# Altium PCB 4 by 4 Keypad.PcbDoc
Units mil, origin at the board's own origin, x right, y up, seen from the top; angles counter-clockwise.
Board outline 1984.9 x 1984.9 mil, 2 copper layers (Top Layer, Bottom Layer); 16 components, 0 nets, 68 pads, 16 vias.
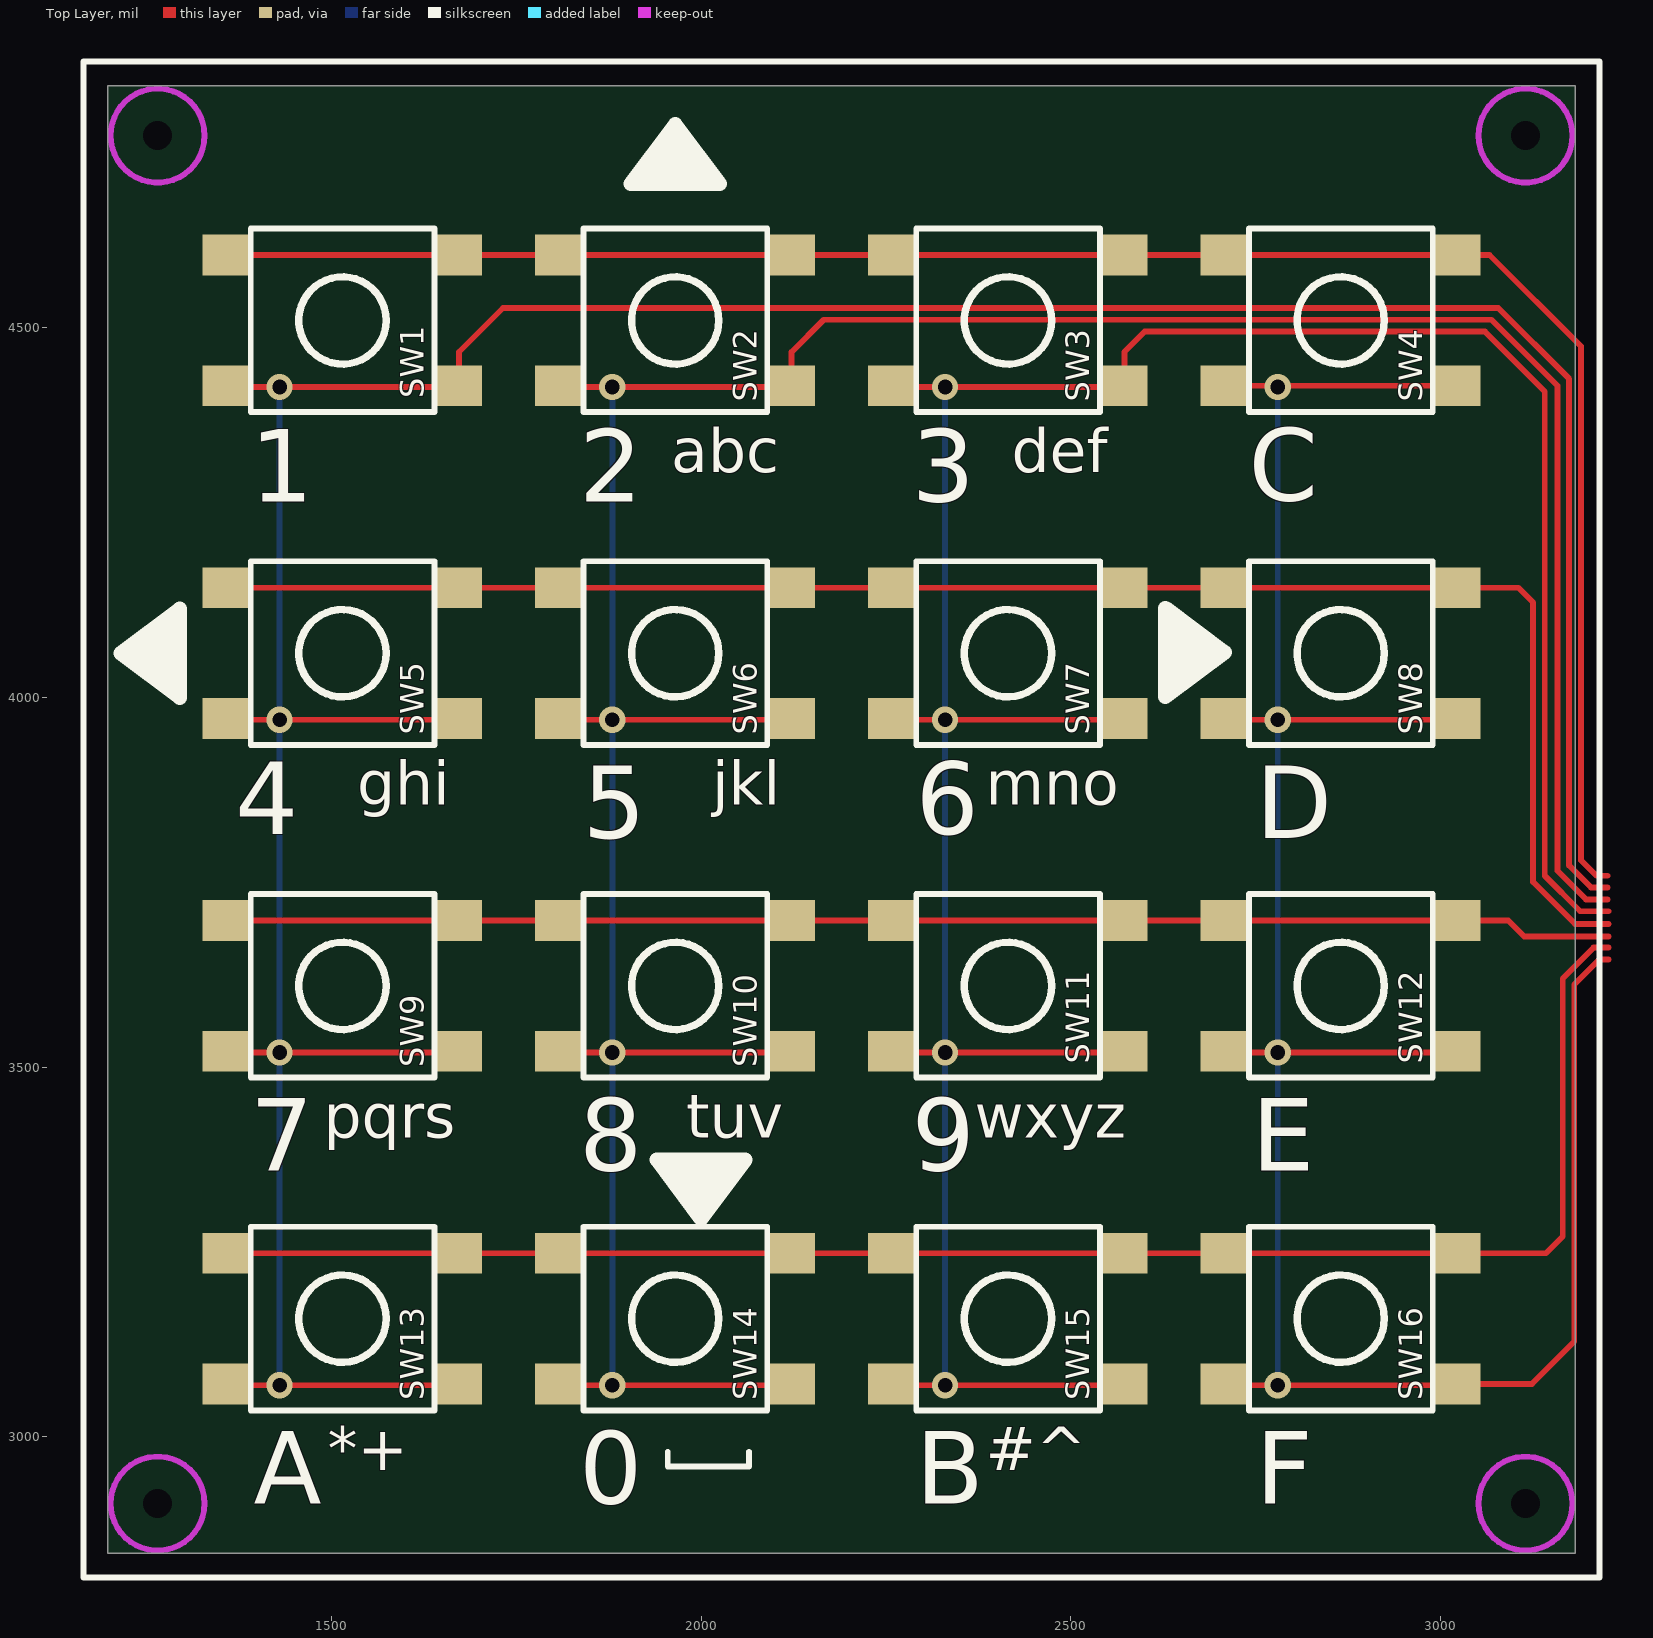
[diagram p0: Top Layer view]
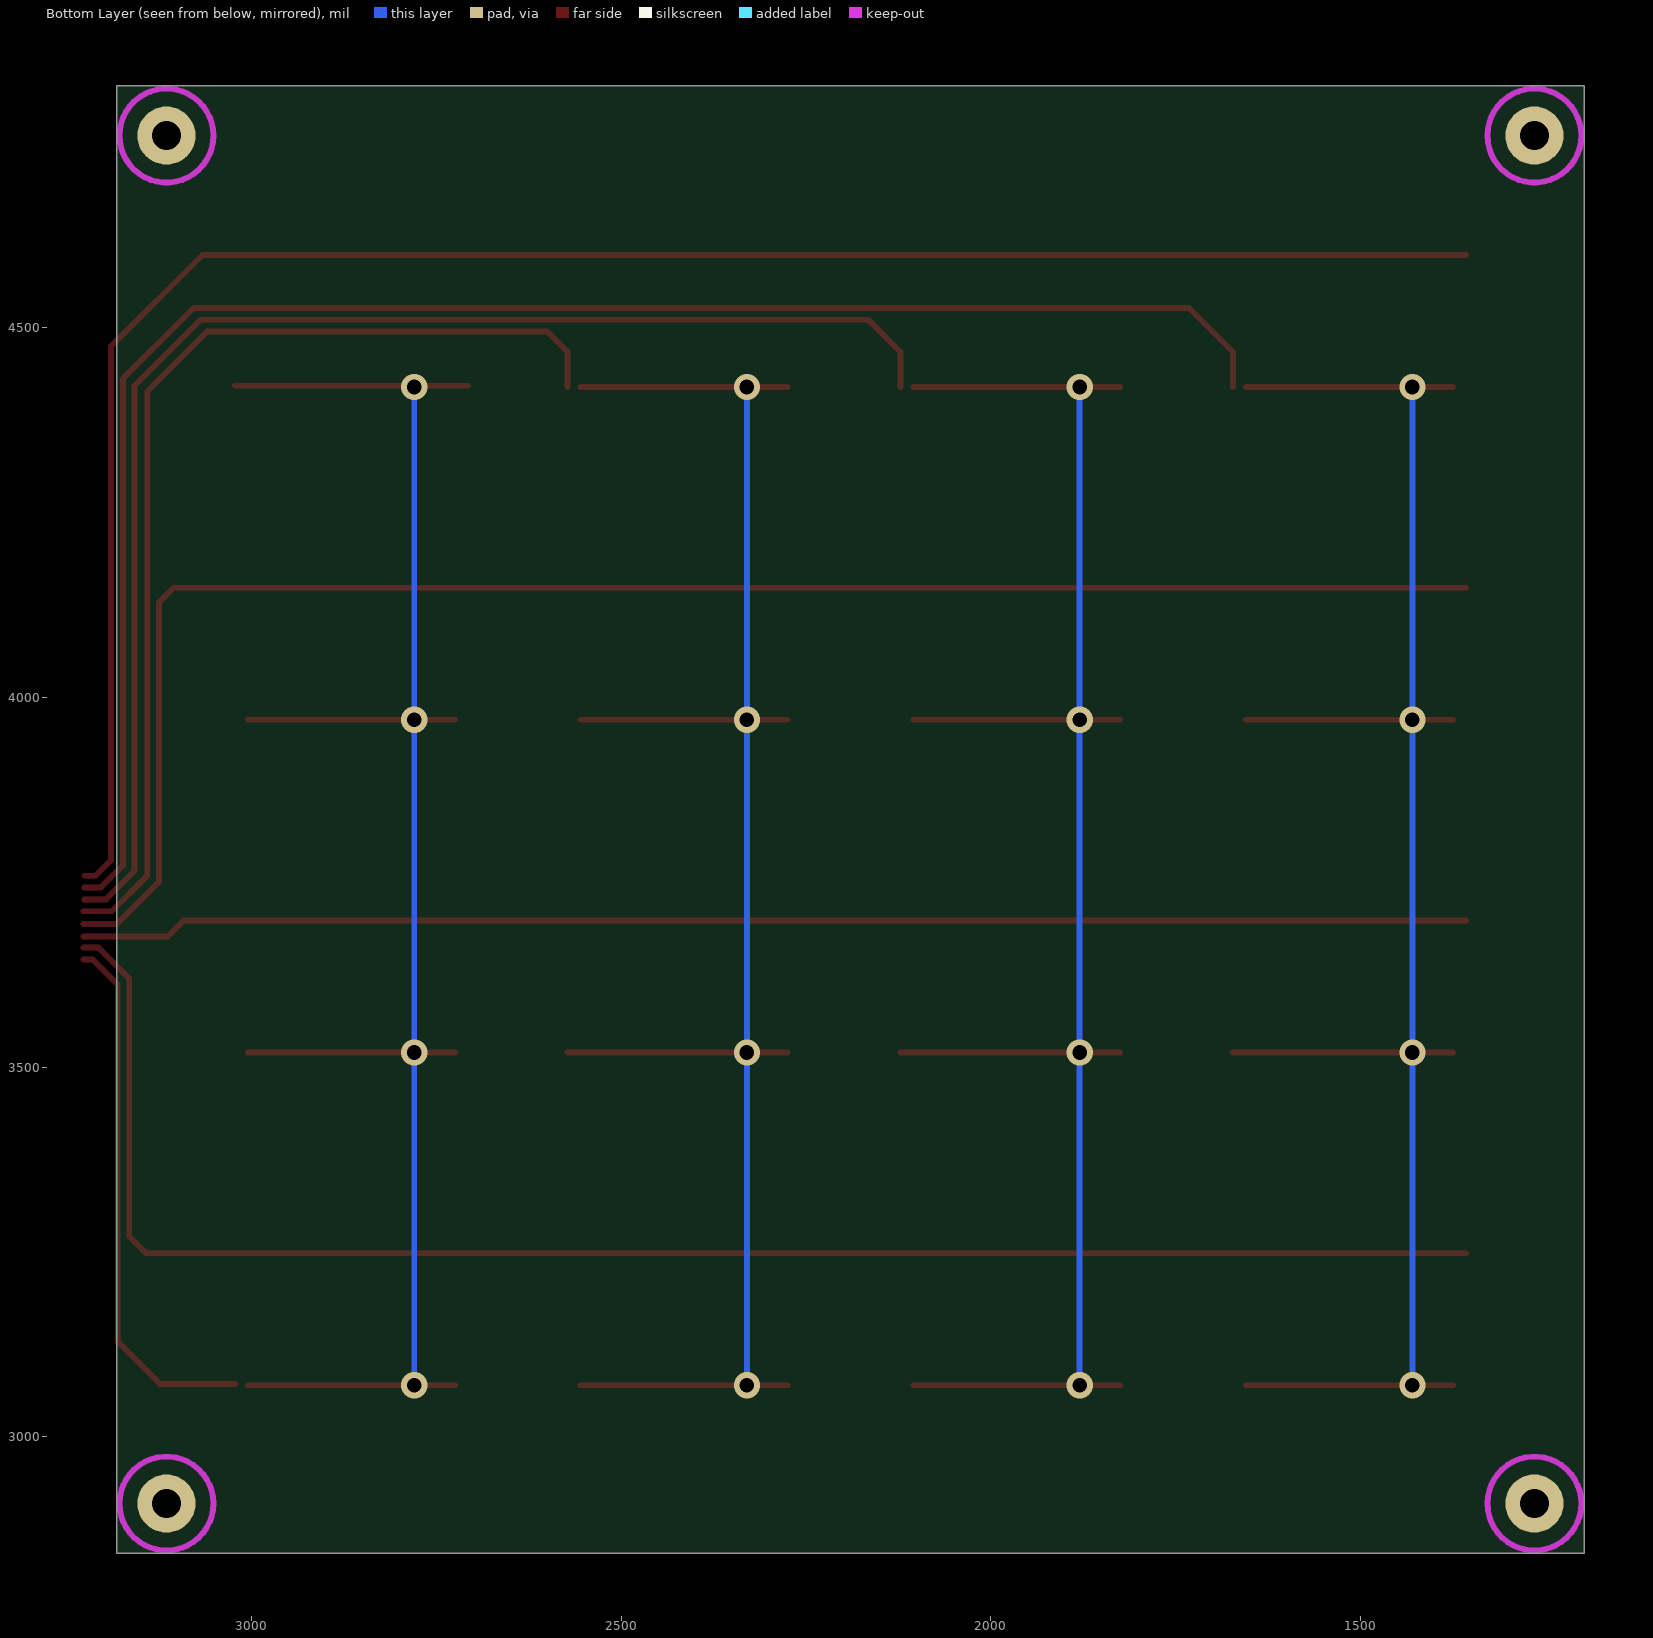
[diagram p1: Bottom Layer view, seen from below]

## Layer stack, top to bottom
Top Layer: signal copper 1.4
Dielectric: dielectric 12.6, FR-4, Dk 4.8
Bottom Layer: signal copper 1.4

## Board outline
1197.55,2842.55 3182.45,2842.55 3182.45,4827.45 1197.55,4827.45

## Design rules (kind name [scope] priority, off if disabled: settings)
Clearance [All] p1: gap=10
FabricationTestPointUsage TestPointUsage [All] p1: valid=0 allowmultiple=FALSE
FabricationTestpoint Testpoint [All] p1: side=3 testpointundercomponent=TRUE minsize=40 maxsize=100 preferedsize=60 minholesize=0 maxholesize=40 preferedholesize=32 testpointgrid=1 allowsidetop=TRUE allowsidebottom=TRUE usegrid=TRUE gridtolerance=0.01
PolygonConnect [All] p1: connectstyle=Relief reliefconductorwidth=10 reliefentries=4 polygonreliefangle="90 Angle"
RoutingVias [All] p1: holewidth=28 width=50 viastyle="Through Hole" minholewidth=28 minwidth=50 maxholewidth=28 maxwidth=50
SilkscreenOverComponentPads [All] p1: minsilkscreentomaskgap=10
SolderMaskExpansion [All] p1: expansion=4
Width [All] p1: maxlimit=10 minlimit=10 preferedwidth=10
25 further rules are at their usual default settings.

## Components (designator, comment, footprint, x,y, rotation, side; value= is the part's Value field where it differs from the comment)
SW1 "DTSM-61-NR" B3FS_SWITCH 1515,4510 r180 top
SW2 "DTSM-61-NR" B3FS_SWITCH 1965,4510 r180 top
SW3 "DTSM-61-NR" B3FS_SWITCH 2415,4510 r180 top
SW4 "DTSM-61-NR" B3FS_SWITCH 2865,4510 r180 top
SW5 "DTSM-61-NR" B3FS_SWITCH 1515,4060 r180 top
SW6 "DTSM-61-NR" B3FS_SWITCH 1965,4060 r180 top
SW7 "DTSM-61-NR" B3FS_SWITCH 2415,4060 r180 top
SW8 "DTSM-61-NR" B3FS_SWITCH 2865,4060 r180 top
SW9 "DTSM-61-NR" B3FS_SWITCH 1515,3610 r180 top
SW10 "DTSM-61-NR" B3FS_SWITCH 1965,3610 r180 top
SW11 "DTSM-61-NR" B3FS_SWITCH 2415,3610 r180 top
SW12 "DTSM-61-NR" B3FS_SWITCH 2865,3610 r180 top
SW13 "DTSM-61-NR" B3FS_SWITCH 1515,3160 r180 top
SW14 "DTSM-61-NR" B3FS_SWITCH 1965,3160 r180 top
SW15 "DTSM-61-NR" B3FS_SWITCH 2415,3160 r180 top
SW16 "DTSM-61-NR" B3FS_SWITCH 2865,3160 r180 top

## Footprints (in the part's own frame and the unit in brackets; to place one, negate y for a bottom-side part, rotate by r counter-clockwise, add the part's x,y. Pads: shape width x height; smd on the part's side, far side on the other; paste and mask are expansions set on the pad)
B3FS_SWITCH [mm]
  rect 1.6x1.4 smd: 1(4.01,-2.25) 2(-4,-2.25) 3(4.01,2.24) 4(-4,2.24)
  silkscreen extent -3.16,-3.16 3.15,3.15

## Part data
SW1 SW2 SW3 SW4 SW5 SW6 SW7 SW8 SW9 SW10 SW11 SW12 SW13 SW14 SW15 SW16: library part B3FS, "SPNA SMD Keyboard Switch"

## Free pads (board coordinates)
  round 31.5 / inner round 31.5 / far side round 78.74 hole 39.37 unplated: KP1(1265,4760) KP2(3115,4760) KP3(1265,2910) KP4(3115,2910)

## Via types
v1: diameter 35.43, hole 19.68, Top Layer to Bottom Layer, tented both sides, 16 vias

## Nets (pads, with @x,y where several pads share a name; then routed paths per layer and width w, separated by ;. In a path a pad name is that pad's centre, name@x,y a point inside that pad or via, vN(x,y) a via of type N, cw(c..) or ccw(c..) an arc to the next point about the centre after c; other vN are vias at no path point)
pads on no net: SW1.1 SW1.2 SW1.3 SW1.4 SW2.1 SW2.2 SW2.3 SW2.4 SW3.1 SW3.2 SW3.3 SW3.4 SW4.1 SW4.2 SW4.3 SW4.4 SW5.1 SW5.2 SW5.3 SW5.4 SW6.1 SW6.2 SW6.3 SW6.4 SW7.1 SW7.2 SW7.3 SW7.4 SW8.1 SW8.2 SW8.3 SW8.4 SW9.1 SW9.2 SW9.3 SW9.4 SW10.1 SW10.2 SW10.3 SW10.4 SW11.1 SW11.2 SW11.3 SW11.4 SW12.1 SW12.2 SW12.3 SW12.4 SW13.1 SW13.2 SW13.3 SW13.4 SW14.1 SW14.2 SW14.3 SW14.4 SW15.1 SW15.2 SW15.3 SW15.4 SW16.1 SW16.2 SW16.3 SW16.4
copper on no net: | length 25354.2
  Top Layer w7.87: 1357.13,3248.58 3142.58,3248.58 3165.25,3271.25 3165.25,3620 3206.5,3661.25 ; 1357.13,3698.58 3022.48,3698.58 3091.67,3698.58 3113.25,3677 ; 1357.13,4148.58 3105.42,4148.58 3125.25,4128.75 3125.25,3750.75 3182,3694 ; 1357.13,4598.58 3066.42,4598.58 3190,4475 3190,3780 3211,3759 ; 1375,3070 1655,3070 ; 1375,3520 1672.48,3520 ; 1375,3970 1655,3970 ; 1375,4420 1655,4420 ; 1672.48,4420 1672.48,4467.48 1732,4527 3078,4527 3174,4431 3174,3773 3203.75,3743.25 ; 1825,3070 2105,3070 ; 1825,3520 2122.48,3520 ; 1825,3970 2105,3970 ; 1825,4420 2105,4420 ; 2122.48,4420 2122.48,4467.48 2166,4511 3069,4511 3158.25,4421.75 3158.25,3765.75 3197,3727 ; 2275,3070 2555,3070 ; 2275,3520 2572.48,3520 ; 2275,3970 2555,3970 ; 2275,4420 2555,4420 ; 2572.48,4420 2572.48,4467.48 2600,4495 3060,4495 3141,4414 3141,3759 3188.75,3711.25 ; 2707.13,4421.81 3022.48,4421.81 ; 2725,3070 3005,3070 ; 2725,3520 3005,3520 ; 2725,3970 3005,3970 ; 3022.48,3071.81 3123.81,3071.81 3181,3129 3181,3612 3214.5,3645.5
  Top Layer w8: 3113.25,3677 3227,3677 ; 3182,3694 3227,3694 ; 3189,3711 3227,3711 ; 3197,3727 3226,3727 ; 3204,3743 3226,3743 ; 3207,3662 3227,3662 ; 3211,3759 3226,3759 ; 3215,3646 3227,3646
  Bottom Layer w7.87: v1(1430,3070) v1(1430,4420) ; v1(1880,3070) v1(1880,4420) ; v1(2330,3070) v1(2330,4420) ; v1(2780,3070) v1(2780,4420)
  other v1: 1430,3520 1880,3520 2330,3520 2780,3520 1430,3970 1880,3970 2330,3970 2780,3970

## Keep-outs
Keep-Out Layer:
  circle w7.87: c3115,4760 r63.51
  circle w7.87: c1265,4760 r63.51
  circle w7.87: c1265,2910 r63.51
  circle w7.87: c3115,2910 r63.51

## Silkscreen, mask and mechanical layers (free items; w line width, h text height)
Top Overlay:
  region: 2663,4081 2663,4041 2693,4041 2693,4081
  region: 2648,4096 2648,4026 2668,4026 2668,4096
  region: 2628,4106 2628,4016 2653,4016 2653,4106
  rectangle: 1930,4715 2000,4735
  rectangle: 1945,4730 1985,4760
  rectangle: 1920,4695 2010,4720
  region: 1295,4015 1295,4105 1270,4105 1270,4015
  region: 1275,4025 1275,4095 1255,4095 1255,4025
  region: 1260,4040 1260,4080 1230,4080 1230,4040
  region: 2020,3340 1980,3340 1980,3310 2020,3310
  region: 2035,3360 1965,3360 1965,3335 2035,3335
  region: 2045,3375 1955,3375 1955,3350 2045,3350
  lines w7.87: 1955,2980 1955,2960 2065,2960 2065,2980 ; 1165,2810 3215,2810 3215,4860 1165,4860 1165,2810
  lines w19.68: 1215,4060 1295,4120 1295,4000 1215,4060 ; 1905,4695 1965,4775 2025,4695 1905,4695 ; 1940,3375 2060,3375 2000,3295 1940,3375 ; 2628,4001 2628,4121 2708,4061 2628,4001
  text "abc" at 1960,4305 h59.06
  text "def" at 2420,4305 h59.06
  text "C" at 2741,4266 h98.43
  text "1" at 1390,4265 h98.43
  text "2" at 1835,4265 h98.43
  text "3" at 2285,4265 h98.43
  text "ghi" at 1535,3855 h59.06
  text "jkl" at 2015,3855 h59.06
  text "mno" at 2385,3855 h59.06
  text "4" at 1370,3815 h98.43
  text "6" at 2290,3815 h98.43
  text "5" at 1840,3810 h98.43
  text "D" at 2750,3810 h98.43
  text "pqrs" at 1490,3405 h59.06
  text "tuv" at 1980,3405 h59.06
  text "wxyz" at 2370,3405 h59.06
  text "7" at 1390,3360 h98.43
  text "8" at 1835,3360 h98.43
  text "9" at 2285,3360 h98.43
  text "E" at 2745,3360 h98.43
  text "*+" at 1495,2955 h59.06
  text "#^" at 2385,2955 h59.06
  text "A" at 1395,2910 h98.43
  text "0" at 1835,2910 h98.43
  text "B" at 2290,2910 h98.43
  text "F" at 2750,2910 h98.43